# EAGLE board test5 (EAGLE 8.6.3)
REV: B
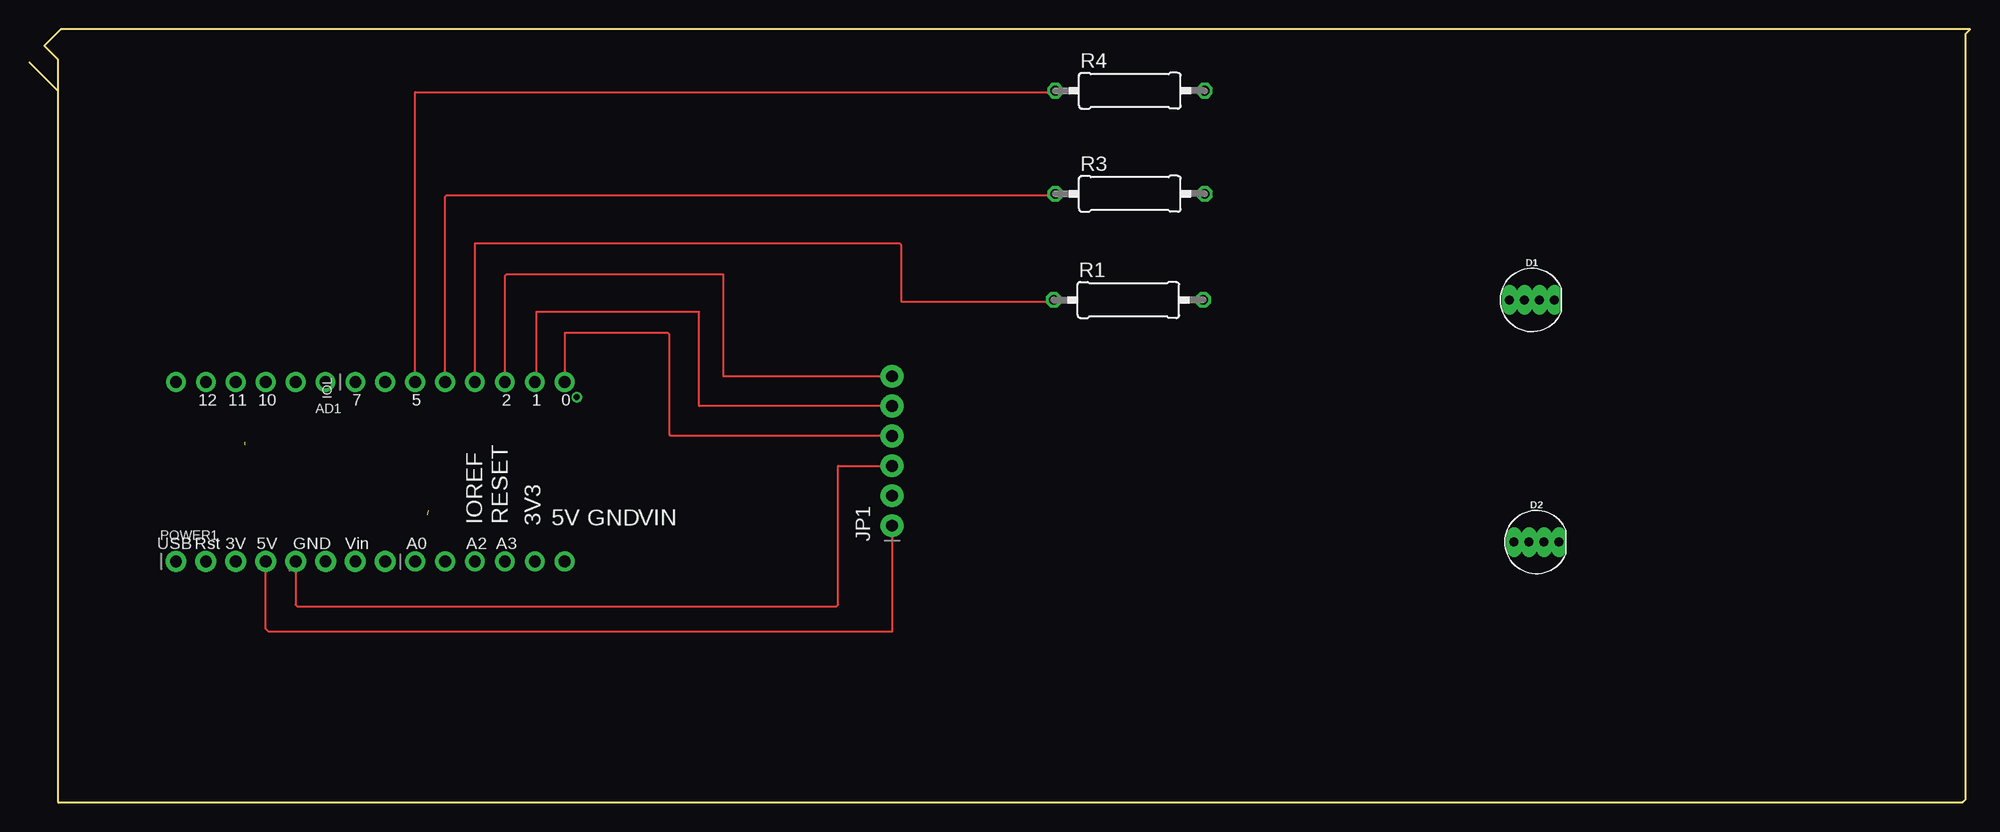
[diagram p0: board, top side]
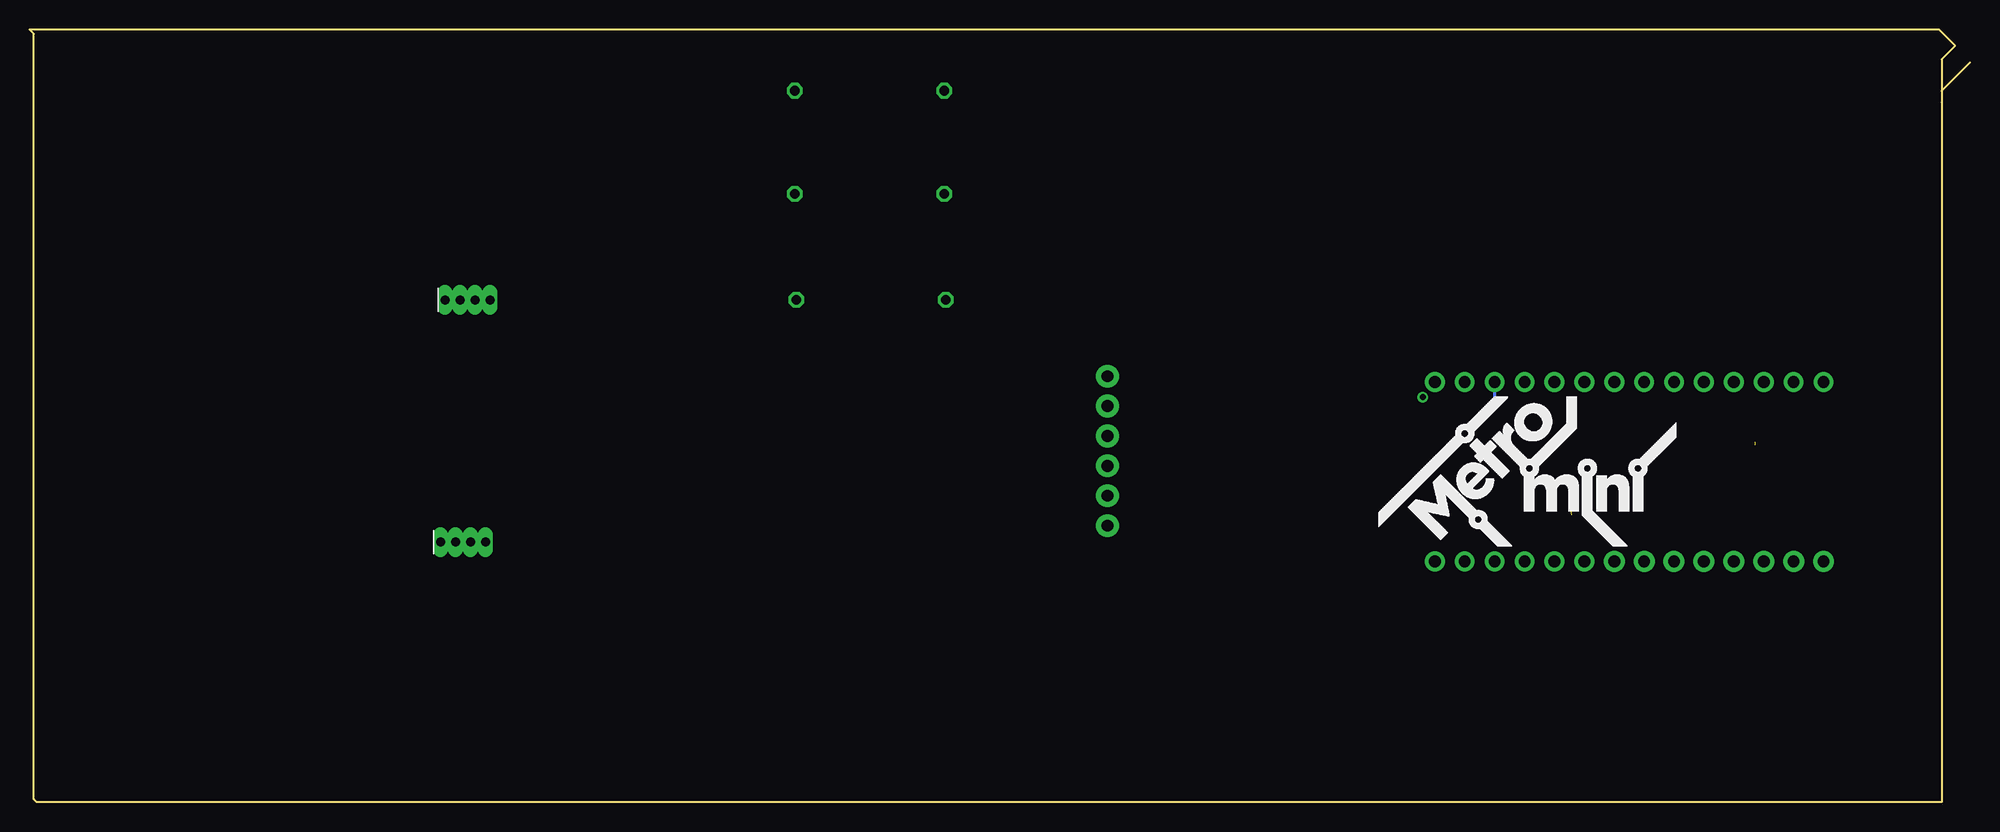
[diagram p1: board, bottom side, seen from below]

Size 164.85 x 65.66 mm. Coordinates in mm from the lower left corner, seen from the top.
Outline: 0,62.87 2.41,60.45
Outline: 2.41,60.45 2.41,59.44 2.41,0 164.21,0 164.46,0.25 164.46,65.28 164.85,65.66 2.67,65.66 1.27,64.26 2.41,63.12 2.41,60.45
Copper layers (1*16): Top 0.035mm / dielectric 1.5mm / Bottom 0.035mm
Design rules "adafruit *": minimum track width 8mil, minimum drill 15.5mil, track to track 8mil, track to pad 8mil, pad to pad 8mil, via to via 8mil, smd to smd 8mil, copper to edge 10mil, drill to drill 8mil, minimum pad ring 10mil, minimum via ring 8mil, stop-mask expansion 2mil, vias tented up to drill 20mil, thermal gap 10mil
Net classes: 1 power: width 0.305 mm, drill 0.483 mm, clearance 0.203 mm; 2 gnd: width 0.305 mm, drill 0.483 mm, clearance 0.203 mm; 3 usbvcc: width 0.305 mm, drill 0.483 mm, clearance 0.203 mm; 4 aref: width 0.254 mm, drill 0.483 mm, clearance 0.203 mm

## Footprints (pad centres in the part's own frame; a part is rotated, then mirrored left to right if it is on the bottom)
1X06_ROUND = drill 1 pad 1.676: 1 -6.35,0; 2 -3.81,0; 3 -1.27,0; 4 1.27,0; 5 3.81,0; 6 6.35,0
LED-RGB-THRU = drill 0.762 pad 0.889 long: 1 1.905,0; 2 0.635,0; 3 -0.635,0; 4 -1.905,0
1X08_ROUND = drill 1 pad 1.676: 1 -8.89,0; 2 -6.35,0; 3 -3.81,0; 4 -1.27,0; 5 1.27,0; 6 3.81,0; 7 6.35,0; 8 8.89,0
1X06_ROUND_76 = drill 1 pad 1.93: 1 -6.35,0; 2 -3.81,0; 3 -1.27,0; 4 1.27,0; 5 3.81,0; 6 6.35,0
1X08_ROUND_70 = drill 1 pad 1.778: 1 -8.89,0; 2 -6.35,0; 3 -3.81,0; 4 -1.27,0; 5 1.27,0; 6 3.81,0; 7 6.35,0; 8 8.89,0
0309/12 = drill 0.813 octagon: 1 -6.35,0; 2 6.35,0

## Placement (x,y rotation side)
AD  20609  [1X06_ROUND]  39.12,20.45 0 top
AD1  20609  [1X06_ROUND]  18.8,35.69 180 top
D1  CLEAR  [LED-RGB-THRU]  127.64,42.67 0 top
D2  CLEAR  [LED-RGB-THRU]  128.02,22.1 0 top
IOL  20610  [1X08_ROUND]  36.58,35.69 0 top
JP1  Breakout  [1X06_ROUND_76]  73.28,29.84 90 top
POWER1  20610  [1X08_ROUND_70]  21.34,20.45 0 top
R1  [0309/12]  93.34,42.67 0 top
R3  [0309/12]  93.47,51.69 0 top
R4  [0309/12]  93.47,60.45 0 top
U$7  [METROMINI_SILK]  50.29,21.72 0 bottom

## Library data of the parts
AD AD1 IOL JP1 POWER1 U$7 = microbuilder
D1 D2 = SparkFun-LED; PROD_ID: DIO-08418
R1 R3 R4 = resistor

## Nets
+3V3: JP1.2
+5V [usbvcc]: JP1.1 POWER1.4
GND [gnd]: JP1.3 POWER1.5
IO2: IOL.6
IO3: IOL.5
IO4: IOL.4
IO5: IOL.3
N$5: JP1.5
N$9: JP1.6
N$10: R1.1
SCK: JP1.4

## Tracks (layer width: path | path; a pad name or v marks a point on that pad's centre or on a via)
+5V
  Top 0.152: JP1.1 73.28,14.48 20.32,14.48 20.07,14.73 POWER1.4
GND
  Top 0.152: 22.1,19.68 22.61,20.19 POWER1.5 22.61,16.76 22.73,16.64 68.58,16.64 68.71,16.76 68.71,28.57 JP1.3
IO2
  Bottom 0.254: 40.39,34.29 IOL.6
IO3
  Top 0.152: IOL.5 37.85,47.5 73.91,47.5 74.04,47.37 74.04,42.55 86.87,42.55
  Bottom 0.254: 37.97,35.69 IOL.5
IO4
  Top 0.152: IOL.4 35.31,51.44 35.43,51.56 86.87,51.56 87,51.44
IO5
  Top 0.152: IOL.3 32.77,60.33 87,60.33 87.12,60.2
N$5
  Top 0.152: JP1.5 56.9,33.66 56.9,41.66 43.05,41.66 43.05,35.69
N$9
  Top 0.152: 40.39,35.56 40.39,44.7 40.51,44.83 58.29,44.83 58.93,44.83 58.93,36.2 67.69,36.2 JP1.6
S$1  (1 unrouted)
S$2  (via drill 0.48)
  other vias: 46.48,34.42
S$15  (1 unrouted)
SCK
  Top 0.152: JP1.4 54.48,31.12 54.36,31.24 54.36,39.75 54.23,39.88 45.47,39.88 45.47,35.69

## Text on the board
tPlace: 12 | 11 | 10 | 7 | 5 | 2 | 1 | 0 | USB | Rst | 3V | 5V | GND | Vin | A0 | A2 | A3
tNames: IOREF | RESET | 3V3 | 5V | GND | VIN
ReferenceLC: PC1 | PC2
214bmp: D:/SmartProjects/Snc/a4_bn_logo2.bmp